# EAGLE board Cerebro 4.8 (EAGLE 7.6.0)
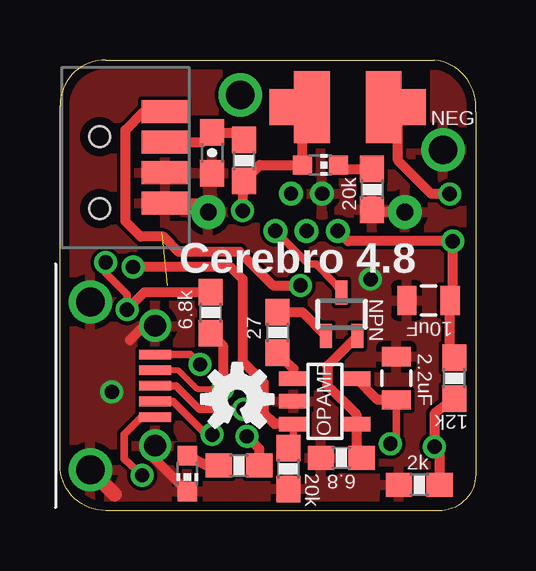
[diagram p0: board, top side]
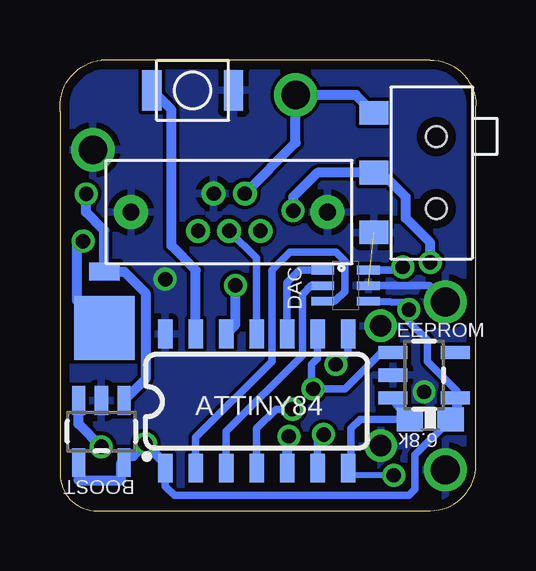
[diagram p1: board, bottom side, seen from below]

Size 17.35 x 18.8 mm. Coordinates in mm from the lower left corner, seen from the top.
Outline: 15.94,0 1.91,0 arc-90 0,1.91 0,16.89 arc-90 1.91,18.8 15.62,18.8 arc-90 17.34,16.64 17.34,1.65 arc-90 15.94,0
Copper layers (1*16): Top 0.0356mm / dielectric 1.5011mm / Bottom 0.0356mm
Design rules "LaenPCBOrder *": minimum track width 6mil, minimum drill 13mil, track to track 6mil, track to pad 6mil, pad to pad 6mil, via to via 6mil, smd to smd 6mil, copper to edge 15mil, drill to drill 6mil, minimum pad ring 7mil, minimum via ring 7mil, stop-mask expansion 3mil, vias tented up to drill 25mil, thermal gap 10mil
tRestrict: area 8.6,15.1 to 15.4,18.7

## Footprints (pad centres in the part's own frame; a part is rotated, then mirrored left to right if it is on the bottom)
0603-CAP = smd 1.1 x 1: 1 -0.85,0; 2 0.85,0
0805 = smd 0.8 x 1.2: 1 -0.9,0; 2 0.9,0
POWERMITE = smd 0.762 x 1.27: ANODE 0.699,0 | smd 2.667 x 2.54: CATHODE -1.651,0
BATT_TERMINAL = drill 1.2: P$1 0,0
SOT23-5 = smd 0.6 x 1.2: 1 -0.95,-1.306; 2 0,-1.306; 3 0.95,-1.306; 4 0.95,1.306; 5 -0.95,1.306
CHIP-LED0603 = smd 0.8 x 0.8: A 0,-0.75; C 0,0.75
1812 = smd 1.499 x 2.997: P$1 -1.499,0; P$2 1.499,0 | smd 1.016 x 1.499: P$3 -2.756,0; P$4 2.756,0
MICRO-B-TH = drill 0.6 pad 1: 1 -1.3,-0.775; 2 -0.65,0.775; 3 0,-0.775; 4 0.65,0.775; 5 1.3,-0.775 | drill 0.7 pad 1.422: P$1 -4.1,0; P$2 4.1,0
SOT23-5' = smd 0.55 x 1.2: 1 -0.95,-1.3; 2 0,-1.3; 3 0.95,-1.3; 4 0.95,1.3; 5 -0.95,1.3
0603-RES = smd 1.1 x 1: 1 -0.85,0; 2 0.85,0
SWITCH-SPDT-SMD = smd 0.991 x 1.194: 1 -2.489,-2.603; 2 0,-2.603; 3 2.489,-2.603 | hole 0.864: -1.499,0; 1.499,0
TSOP6 = smd 0.965 x 1.93: P$1 -1.905,-1.27; P$2 -0.635,-1.27; P$3 0.635,-1.27; P$4 1.905,-1.27
USB_HORZ_REINFORCED_MICRO = drill 1.2: G1 -3.5,0; G2 3.5,0 | smd 0.4 x 1.35: P1 -1.3,2.7; P2 -0.65,2.7; P3 0,2.7; P4 0.65,2.7; P5 1.3,2.7 | drill 0.9: P$1 -2.5,2.7; P$2 2.5,2.7
SOT323 = smd 0.5 x 1: 1 0,0.9; 2 -0.65,-0.9; 3 0.65,-0.9
SC-70 = smd 0.36 x 0.95: CS/LD -0.65,-0.95; GND 0,0.95; SCK 0,-0.95; SDI 0.65,-0.95; VCC 0.65,0.95; VOUT -0.65,0.95
SO14 = smd 0.6 x 1.2: 1 -3.81,-2.8; 2 -2.54,-2.8; 3 -1.27,-2.8; 4 0,-2.8; 5 1.27,-2.8; 6 2.54,-2.8; 7 3.81,-2.8; 8 3.81,2.8; 9 2.54,2.8; 10 1.27,2.8; 11 0,2.8; 12 -1.27,2.8; 13 -2.54,2.8; 14 -3.81,2.8
SWITCH_MOMENTARY_XS = smd 0.8 x 1.7: P$1 -1.7,0; P$2 1.7,0

## Placement (x,y rotation side)
C1  .1uF  [0603-CAP]  6.35,14.92 270 top
C3  2.2uF  [0805]  14.03,5.52 90 top
C4  10uF  [0805]  15.37,8.76 180 top
D1  MBRM140T3G  [POWERMITE]  15.49,9.27 90 bottom
GROUND  BATT_TERMINAL  [BATT_TERMINAL]  15.98,15.05 0 top
IC1  OPA237N  [SOT23-5]  11.05,4.56 270 top
INDICATOR_LED  LED  [CHIP-LED0603]  10.86,14.41 270 top
INDICATOR_LED1  LED  [CHIP-LED0603]  5.31,1.55 180 top
L1  10uH  [1812]  12,16.83 180 top
LASER_OUTPUT  USB_MICROB_PLUG-PTH2  [MICRO-B-TH]  10.29,12.45 0 top
MIC2288  BOOST  [SOT23-5']  15.62,3.3 180 bottom
R1  27  [0603-RES]  9.08,7.43 270 top
R2  6.8  [0603-RES]  11.73,2.21 180 top
R3  2k  [0603-RES]  14.99,1.08 0 top
R4  12k  [0603-RES]  16.45,5.52 90 top
R5  20k  [0603-RES]  13.02,13.4 270 top
R6  6.8k  [0603-RES]  6.29,8.26 90 top
R7  6.8k  [0603-RES]  1.91,3.81 0 bottom
R8  20k  [0603-RES]  9.52,1.75 270 top
R9  20k  [0603-RES]  7.47,1.88 180 top
R10  100  [0603-RES]  7.68,14.61 90 top
S3  [SWITCH-SPDT-SMD]  1.65,14.1 270 bottom
SDF  TSOP6238TT  [TSOP6]  3.11,14.73 90 top
SERIAL_SOCKET  USB_SOCKET_MICRO_VERTREINFORCED  [USB_HORZ_REINFORCED_MICRO]  1.27,5.21 270 top
T1  FJX3904TF  [SOT323]  11.75,8.19 0 top
U$1  DAC_LTC2630  [SC-70]  5.44,9.39 270 bottom
U$2  ATTINY84  [SO14]  9.14,4.57 0 bottom
U$3  SWITCH-MOMENTARY-NO  [SWITCH_MOMENTARY_XS]  11.81,17.53 0 bottom
U$4  EEPROM24C64A  [SOT23-5']  2.16,5.65 270 bottom
U$6  [OSHW-LOGO-S]  7.39,4.65 0 top
U$8  BATT_TERMINAL  [BATT_TERMINAL]  7.52,17.34 0 top

## Library data of the parts
C1 C3 C4 = SparkFun-Capacitors
D1 GROUND L1 LASER_OUTPUT MIC2288 R1-R10 S3 SDF SERIAL_SOCKET U$1 U$3 U$4 U$8 = Andy-library
IC1 = burr-brown; MF: TEXAS INSTRUMENTS; MPN: OPA237NA/250; OC_FARNELL: 4625298; OC_NEWARK: 35C1874
INDICATOR_LED INDICATOR_LED1 = led
T1 = zetex; MPN: DSS4160U-7; OC_FARNELL: 1710696; OC_NEWARK: 25R4558
U$2 = SparkFun-DigitalIC; PROD_ID: IC-11285
U$6 = SparkFun-Aesthetics

## Nets
8.68VDC: C4.1 D1.CATHODE LASER_OUTPUT.5 R4.2
BATT: C3.1 IC1.5 INDICATOR_LED.A L1.P$2 L1.P$4 MIC2288.4 MIC2288.5 R6.2 R7.2 R10.1 S3.2 U$1.VCC U$2.1 U$4.4
GND: C1.2 C3.2 C4.2 GROUND.P$1 IC1.2 INDICATOR_LED1.C LASER_OUTPUT.4 LASER_OUTPUT.P$1 LASER_OUTPUT.P$2 MIC2288.2 R2.2 R3.1 R5.2 R8.2 S3.3 SDF.P$1 SDF.P$2 SERIAL_SOCKET.G1 SERIAL_SOCKET.G2 SERIAL_SOCKET.P$1 SERIAL_SOCKET.P$2 U$1.GND U$2.14 U$3.P$2 U$4.2
MISO/TX: SERIAL_SOCKET.P1 U$2.8
MOSI: R7.1 SERIAL_SOCKET.P5 U$2.7 U$4.3
N$1: SDF.P$4 U$2.12
N$2: U$1.CS/LD U$2.10
N$3: IC1.3 R8.1 U$1.VOUT
N$4: LASER_OUTPUT.2 S3.1 U$8.P$1
N$5: LASER_OUTPUT.3 U$2.11
N$6: IC1.4 R2.1 T1.3
N$7: U$2.13 U$3.P$1
N$8: INDICATOR_LED.C R5.1
N$9: IC1.1 R1.2
N$10: MIC2288.3 R3.2 R4.1
N$11: R1.1 T1.2
N$12: C1.1 R10.2 SDF.P$3
N$13: R9.1 U$2.5
N$14: U$1.SCK U$2.3
N$15: D1.ANODE L1.P$1 L1.P$3 MIC2288.1
N$16: U$1.SDI U$2.2
N$17: LASER_OUTPUT.1 T1.1
N$18: INDICATOR_LED1.A R9.2
RESET: SERIAL_SOCKET.P3 U$2.4
RX: SERIAL_SOCKET.P4 U$2.6
SCK: R6.1 SERIAL_SOCKET.P2 U$2.9 U$4.1

## Tracks (layer width: path | path; a pad name or v marks a point on that pad's centre or on a via)
8.68VDC  (via drill 0.6 pad 0.25)
  Top 0.305: 16.26,8.01 C4.1 | R4.2 16.27,6.73
  Top 0.406: 16.27,6.73 C4.1 16.38,8.88 v16.38,11.24 12.02,11.24 LASER_OUTPUT.5
  Bottom 0.305: 16.64,8.76 D1.CATHODE
  Bottom 0.406: 16.64,8.76 16.64,10.99 v16.38,11.24
BATT  (via drill 0.6, 0.6 pad 0.25)
  Top 0.305: C3.1 14.03,3.05 v13.78,2.79 | v1.91,10.35 1.91,9.91 2.79,9.02 v2.79,8.38
  Top 0.406: L1.P$4 L1.P$2 10.11,16.43 INDICATOR_LED.A 8.34,14.41 R10.1 7.49,13.56 7.62,13.44 v7.62,12.51 | R6.2 3.52,9.11 v2.79,8.38 | C3.1 13.24,4.62 IC1.5
  Bottom 0.305: 14.79,2 MIC2288.5 | U$2.1 12.95,1.02 12.57,0.64 2.79,0.64 2.54,0.89 2.54,2.33 R7.2 | 0.8,4.7 0.8,4.99 2.03,6.22 2.03,7.11 2.79,7.87 v2.79,8.38 3.1,8.68 U$1.VCC
  Bottom 0.406: MIC2288.4 16.57,1.27 14.79,1.27 14.79,2 | MIC2288.5 14.67,2.28 14.29,2.28 v13.78,2.79 13.08,2.1 12.95,2.1 U$2.1 | v1.91,10.35 1.91,11.18 2.92,12.19 2.92,13.08 3.94,14.1 S3.2 6.6,14.1 7.62,13.08 v7.62,12.51 | U$4.4 0.8,4.7 0.8,4.06 R7.2
GND  (via drill 0.6, 0.6 pad 0.25)  (1 unrouted)
  Top 0.406: SDF.P$1 5.81,12.83 LASER_OUTPUT.P$1 | LASER_OUTPUT.P$2 13.12,12.45 R5.2 | SERIAL_SOCKET.P$1 3.52,7.71 2.92,7.11 | INDICATOR_LED1.C 3.97,2.14 SERIAL_SOCKET.P$2
  Top 0.61: SERIAL_SOCKET.G2 2.29,0.69
  Bottom 0.305: U$1.GND 1.95,9.38 SERIAL_SOCKET.G1
  other vias: 12.95,9.65 2.16,4.95
  pour Bottom: 44.7,39.24 -18.8,39.24 -18.8,-24.26 44.7,-24.26
  pour Top: -17.91,36.83 45.59,36.83 44.32,-24.13 -19.18,-24.13
MISO/TX  (via drill 0.6)
  Top 0.305: SERIAL_SOCKET.P1 5.43,6.51 v5.84,6.1
  Bottom 0.305: 5.4,7.43 U$2.8 5.33,6.6 v5.84,6.1
MOSI  (via drill 0.6)
  Top 0.305: v3.43,1.47 2.67,2.16 2.67,3.17 3.4,3.91 SERIAL_SOCKET.P5
  Bottom 0.254: v3.43,1.47 5.04,1.47 U$2.7
  Bottom 0.305: R7.1 4.83,3.81 5.21,3.43 5.21,1.9 U$2.7
  Bottom 0.406: R7.1 U$4.3
N$1  (via drill 0.6)
  Top 0.406: v10.03,9.4 8.89,9.4 7.49,10.79 4.95,10.79 4.32,11.43 3.37,11.43 2.73,12.06 2.73,15.88 3.49,16.64 SDF.P$4
  Bottom 0.406: U$2.12 10.03,7.75 v10.03,9.4
N$2
  Bottom 0.305: U$2.10 7.87,9.53 7.36,10.04 U$1.CS/LD
N$3  (via drill 0.6)
  Top 0.305: R8.1 9.74,2.82 IC1.3
  Top 0.406: v3.05,10.16 7.11,10.16 7.62,9.65 7.62,6.22 8.51,5.33 8.51,4.06 8.96,3.61 IC1.3
  Bottom 0.305: U$1.VOUT 3.17,10.04 v3.05,10.16
N$4
  Bottom 0.406: S3.1 5,17.34 U$8.P$1 7.52,15.34 LASER_OUTPUT.2
N$5
  Bottom 0.305: U$2.11 9.14,10.53 LASER_OUTPUT.3
N$6
  Top 0.406: T1.3 11.15,6.04 11.15,5.23 12.35,4.03 IC1.4 12.35,2.21 R2.1
N$7
  Bottom 0.406: U$2.13 11.68,10.03 12.7,11.05 12.7,16.71 U$3.P$1
N$8
  Top 0.406: 12.87,14.1 R5.1 11.46,14.25 INDICATOR_LED.C
N$9
  Top 0.406: IC1.1 9.74,5.92 R1.2
N$10  (via drill 0.6 pad 0.25)
  Top 0.305: R4.1 16.13,4.69
  Top 0.406: R4.1 15.62,4.05 v15.62,2.67 15.84,2.45 R3.2
  Bottom 0.305: MIC2288.3 16.57,4.57
  Bottom 0.406: v15.62,2.67 16.57,3.62 MIC2288.3
N$11
  Top 0.406: R1.1 10.11,8.28 T1.2
N$12
  Top 0.406: SDF.P$3 5.95,15.37 C1.1 7.37,15.77 R10.2
N$13  (via drill 0.6)
  Top 0.406: R9.1 8.32,2.58 v7.8,3.1
  Bottom 0.406: v7.8,3.1 7.87,3.1 U$2.5
N$14
  Bottom 0.305: U$2.3 10.41,3.3 7.24,6.48 7.24,9.02 6.87,9.38 U$1.SCK
N$15  (via drill 0.6 pad 0.3)
  Top 0.406: v16.26,13.21 15.49,13.21 14.1,14.61 14.1,16.23 14.16,16.23 L1.P$3 L1.P$1
  Bottom 0.406: MIC2288.1 13.78,5.49 13.78,9.08 14.67,9.97 D1.ANODE 15.49,11.68 16.26,12.45 v16.26,13.21
N$16
  Bottom 0.305: U$2.2 11.68,3.05 8.51,6.22 8.51,10.03 7.75,10.79 5.84,10.79 5.46,10.41 5.46,9.14 5.87,8.73 U$1.SDI
N$17
  Top 0.305: T1.1 11.49,9.46 10.67,10.29 10.37,10.29 LASER_OUTPUT.1
N$18
  Top 0.406: R9.2 6.41,1.73 INDICATOR_LED1.A
RESET  (via drill 0.6 pad 0.25)
  Top 0.305: SERIAL_SOCKET.P3 4.85,5.21 5.83,4.23 v7.66,4.23
  Bottom 0.305: 9.14,2.16 9.14,3.43 8.34,4.23 v7.66,4.23
  Bottom 0.406: 9.14,2.16 U$2.4
RX  (via drill 0.6)
  Top 0.305: SERIAL_SOCKET.P4 4.71,4.56 6.1,3.17 v6.35,3.17
  Bottom 0.305: v6.35,3.17 6.6,2.92 U$2.6
SCK  (via drill 0.6 pad 0.25)
  Top 0.254: SERIAL_SOCKET.P2 3.99,5.84 4.95,5.84 5.72,5.08 v6.79,5.08
  Top 0.406: R6.1 6.79,6.9 v6.79,5.08
  Bottom 0.254: U$4.1 3.81,6.6
  Bottom 0.305: U$2.9 6.6,6.35 6.86,6.1 6.86,5.14 v6.79,5.08 5.46,5.08 3.94,6.6 3.81,6.6

## Text on the board
tNames: NEG | Cerebro 4.8 | NPN | OPAMP
bNames: DAC | EEPROM | ATTINY84